# Altium PCB MCB1313epf.PcbDoc
Units mm, origin at the board's own origin, x right, y up, seen from the top; angles counter-clockwise.
Board outline 60 x 60 mm, 2 copper layers (Top Layer, Bottom Layer), stack 0.671 mm thick; 55 components, 64 nets, 243 pads, 30 vias.
Unrouted connection lines stored in the file: 3.
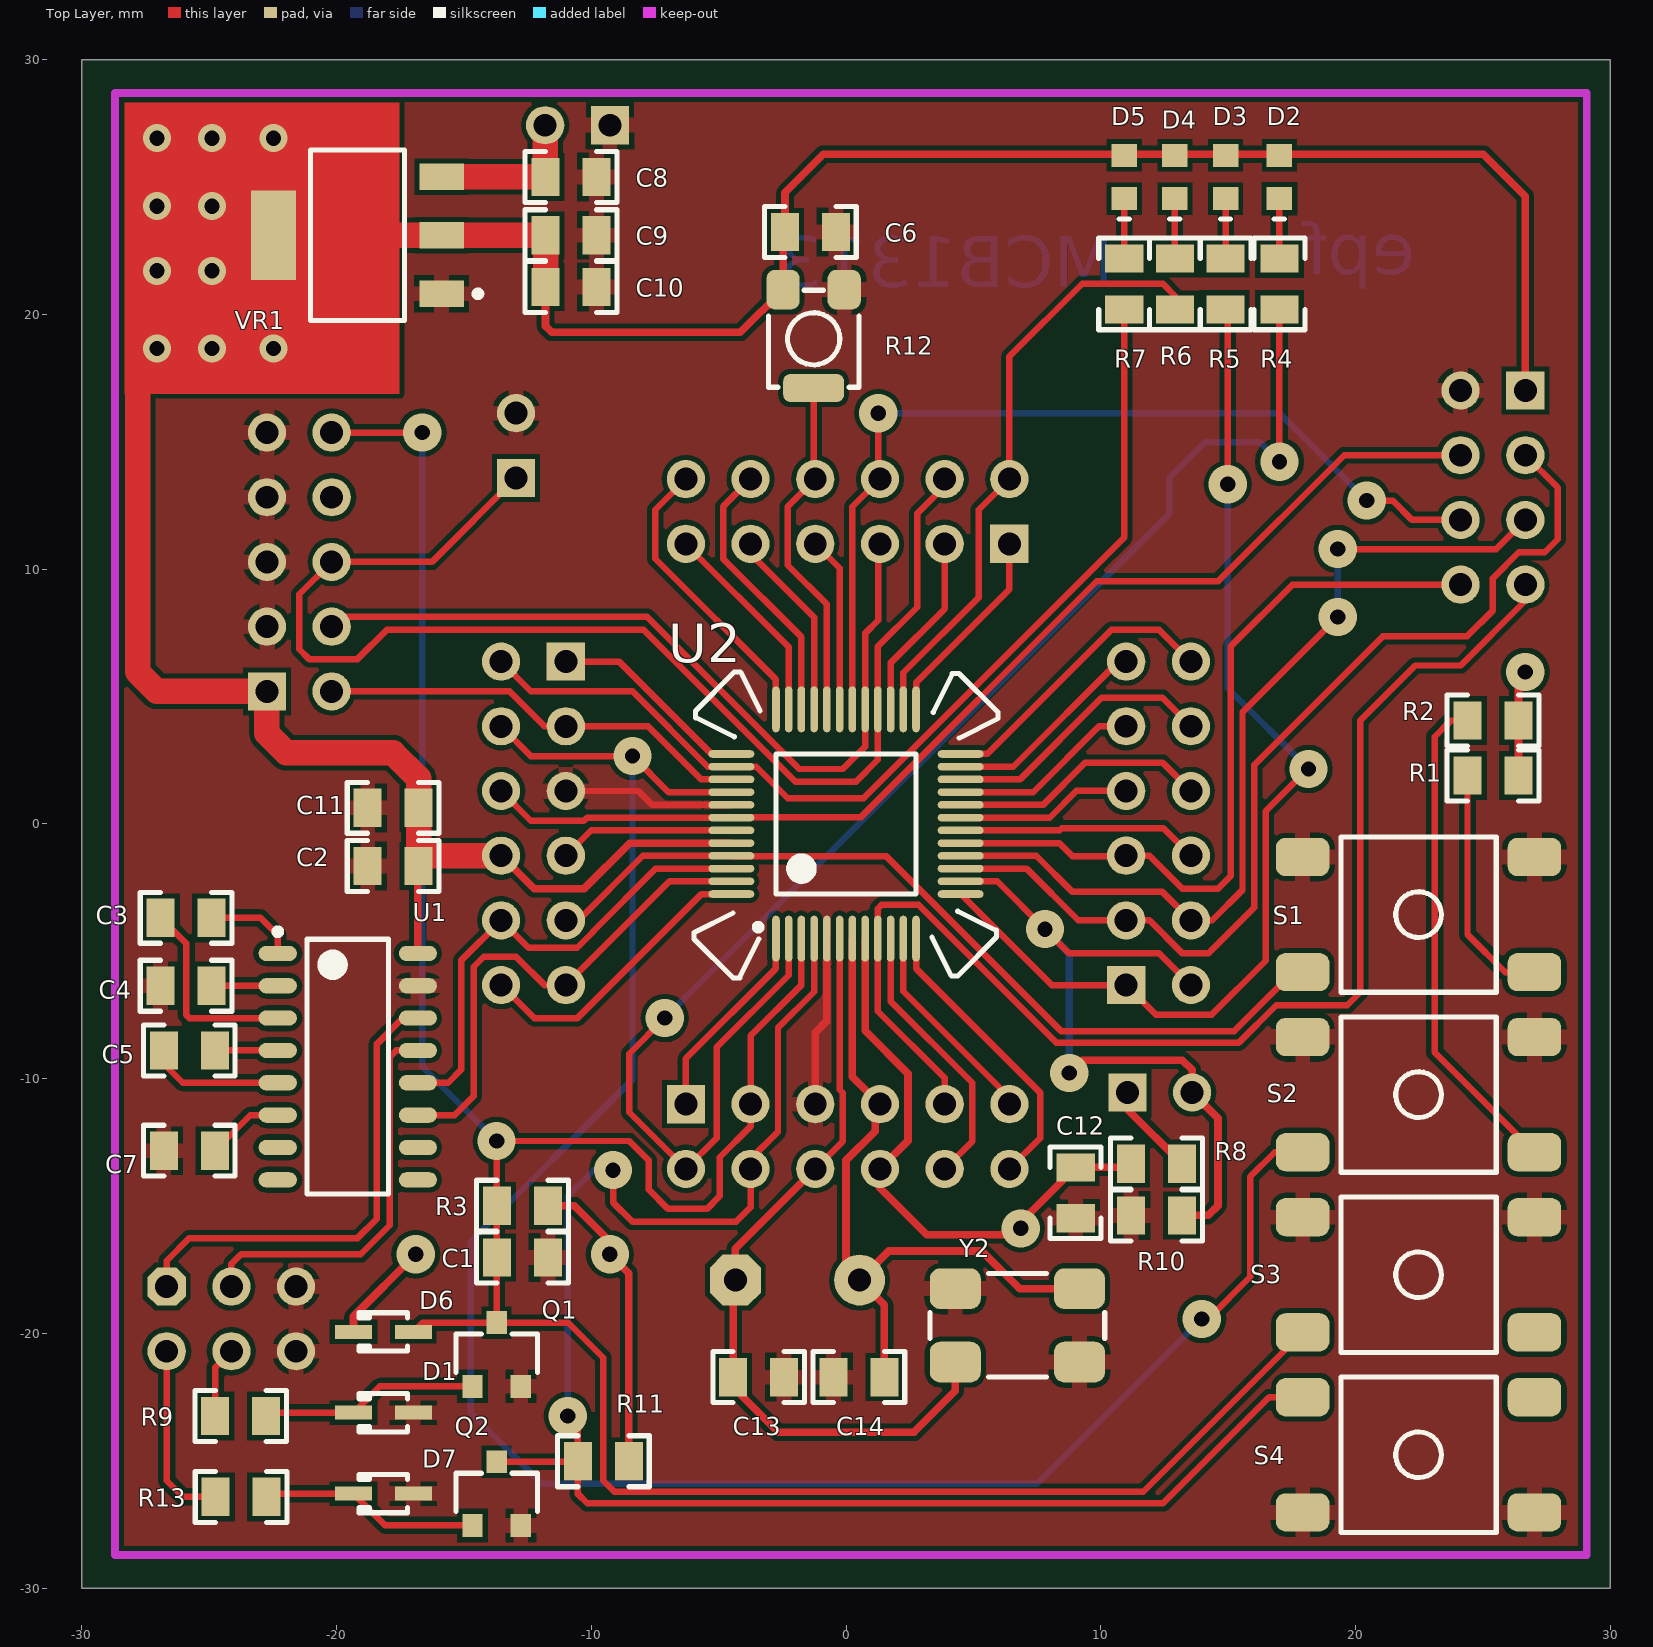
[diagram p0: Top Layer view]
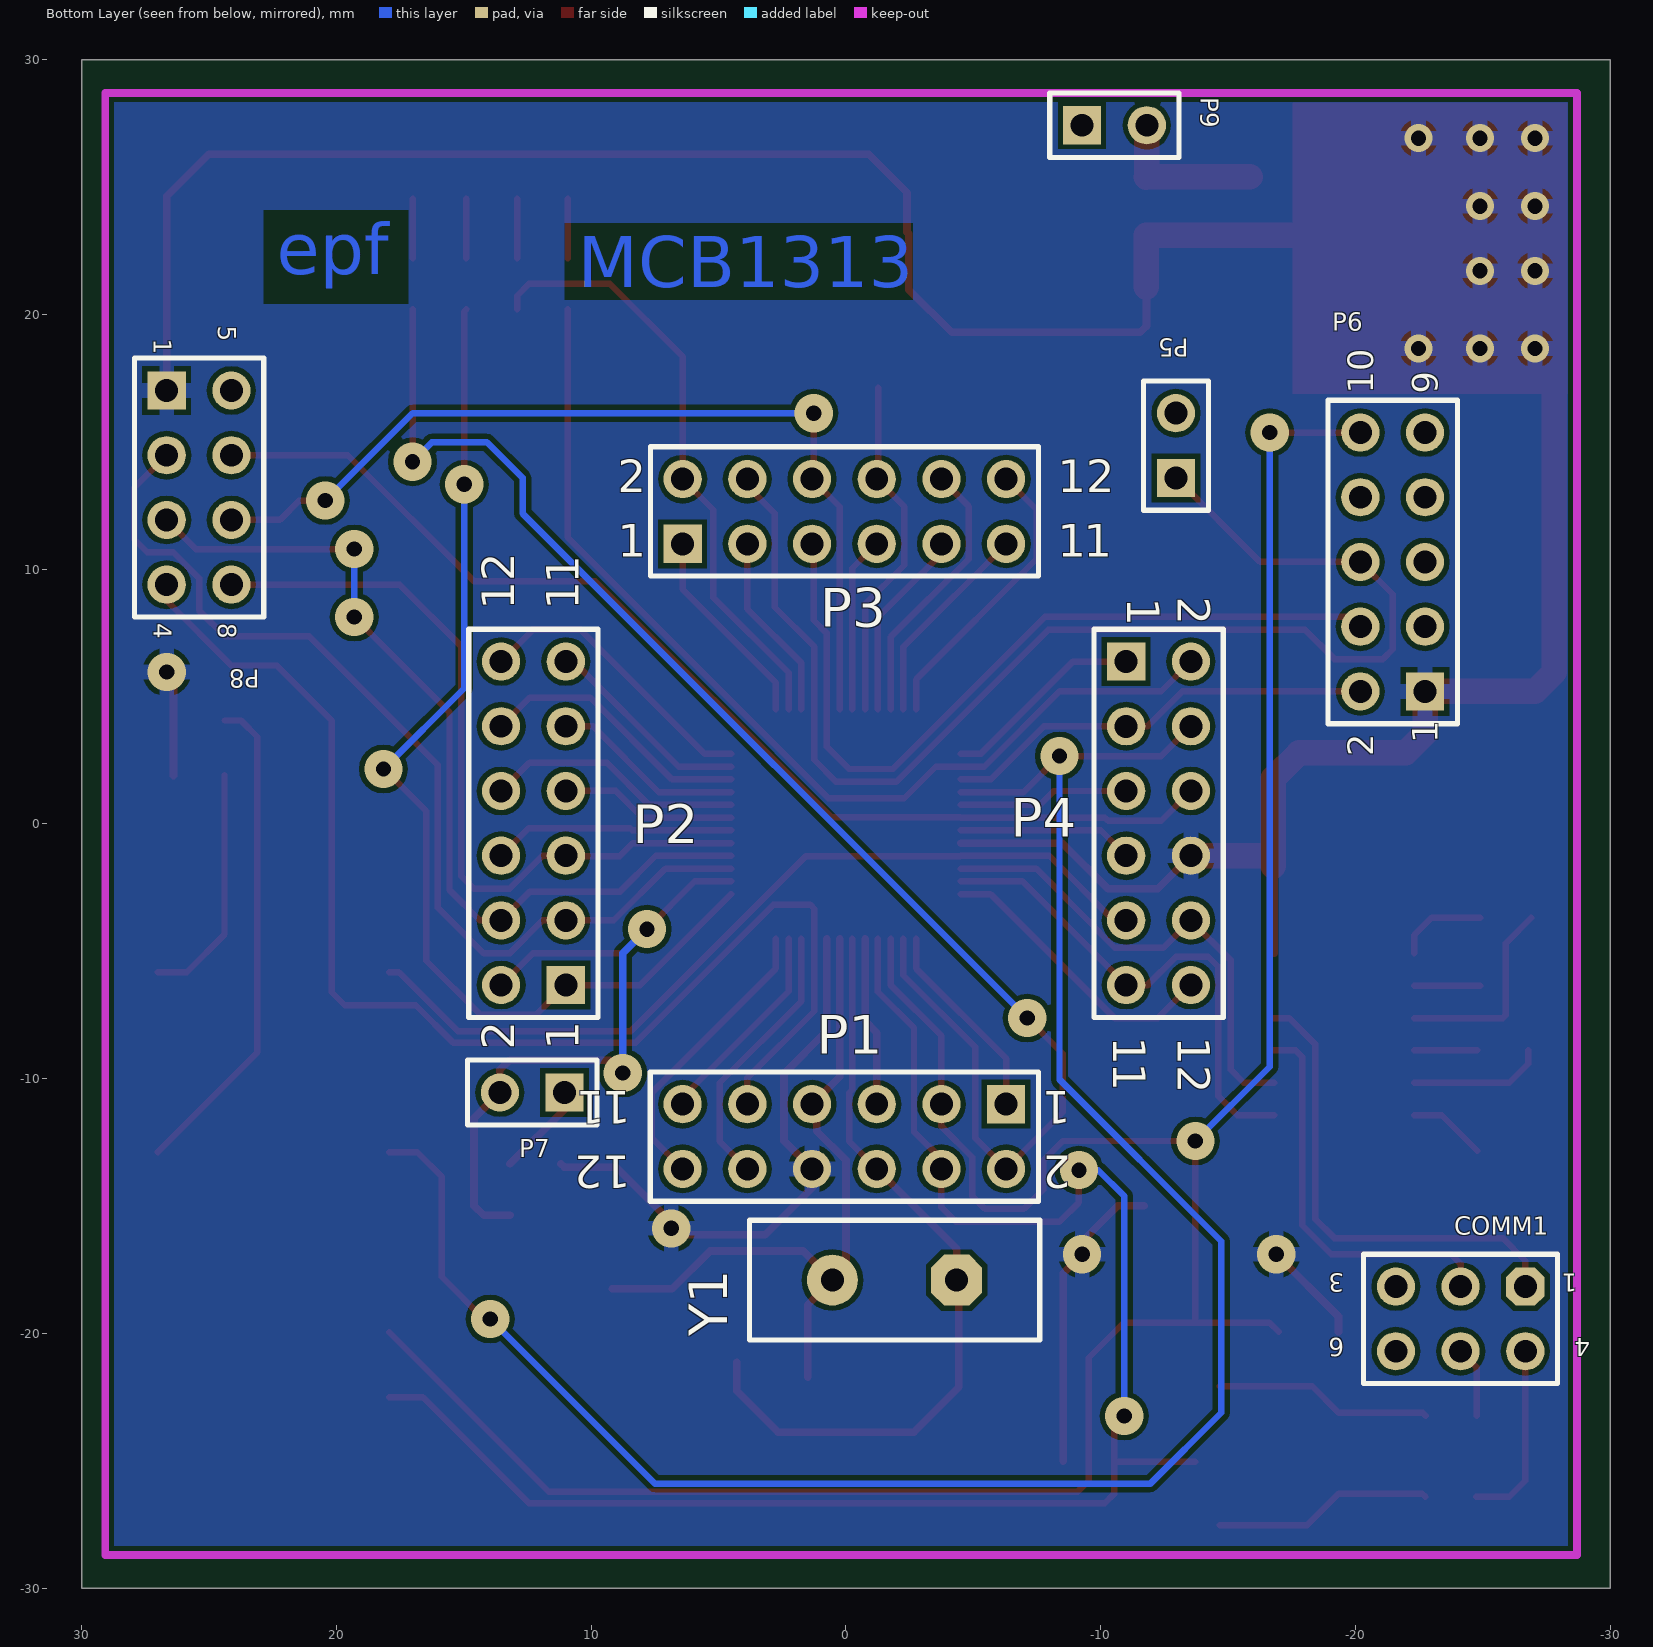
[diagram p1: Bottom Layer view, seen from below]

## Layer stack, top to bottom
Top Layer: signal copper 0.0356
Dielectric: core 0.6, FR-4, Dk 4.8
Bottom Layer: signal copper 0.0356

## Board outline
-30,-30 30,-30 30,30 -30,30

## Design rules (kind name [scope] priority, off if disabled: settings)
Clearance [All] p1: gap=0.2
PlaneConnect [All] p1: planeconnectstyle=Direct reliefexpansion=0.508 reliefentries=4 reliefconductorwidth=0.254 reliefairgap=0.254
PolygonConnect [All] p1: connectstyle=Relief reliefconductorwidth=0.6 reliefentries=4 polygonreliefangle="90 Angle"
RoutingVias [All] p1: holewidth=0.6 width=1.5 viastyle="Through Hole" minholewidth=0.6 minwidth=0.8 maxholewidth=3 maxwidth=3
SilkToSilkClearance [All] p1: silktosilkclearance=0
SilkscreenOverComponentPads [All] p1: minsilkscreentomaskgap=0
SolderMaskExpansion [All] p1: expansion=0.102
Width [All] p1: maxlimit=3 minlimit=0.2 preferedwidth=0.5
25 further rules are at their usual default settings.

## Components (designator, comment, footprint, x,y, rotation, side; value= is the part's Value field where it differs from the comment)
C1 "Capacitor" 0805_CAP -12.7,-17.018 r0 top
C2 "Capacitor" 0805_CAP -17.78,-1.651 r0 top
C3 "Capacitor" 0805_CAP -25.908,-3.683 r180 top
C4 "Capacitor" 0805_CAP -25.908,-6.35 r0 top
C5 "Capacitor" 0805_CAP -25.781,-8.89 r0 top
C6 "Capacitor" 0805_CAP -1.397,23.241 r180 top
C7 "Capacitor" 0805_CAP -25.781,-12.827 r0 top
C8 "Capacitor" 0805_CAP -10.795,25.4 r180 top
C9 "Capacitor" 0805_CAP -10.795,23.114 r180 top
C10 "Capacitor" 0805_CAP -10.795,21.082 r180 top
C11 "Capacitor" 0805_CAP -17.78,0.635 r0 top
C12 "Capacitor" 0805_CAP 9.017,-14.478 r90 top
C13 "Capacitor" 0805_CAP -3.429,-21.717 r180 top
C14 "Capacitor" 0805_CAP 0.508,-21.717 r180 top
COMM1 "AP_COMM" HDR2X3_CEN -26.67,-18.161 r0 bottom
D1 "BAS316" SOD-323 -18.161,-19.939 r180 top
D2 "LED" LED0603 17.018,25.4 r270 top
D3 "LED" LED0603 14.901,25.4 r270 top
D4 "LED" LED0603 12.912,25.4 r270 top
D5 "LED" LED0603 10.922,25.4 r270 top
D6 "BAS316" SOD-323 -18.161,-23.114 r180 top
D7 "BAS316" SOD-323 -18.161,-26.289 r180 top
P1 "Header 6X2" HDR2X6 -6.286,-11 r0 bottom locked
P2 "Header 6X2" HDR2X6 11,-6.324 r90 bottom locked
P3 "Header 6X2" HDR2X6 6.413,11 r180 bottom locked
P4 "Header 6X2" HDR2X6 -11,6.376 r270 bottom locked
P5 "Header 2" HDR1X2 -12.954,13.589 r90 bottom
P6 "Header 5X2" HDR2X5 -22.733,5.207 r90 bottom
P7 "Header 2" HDR1X2 11.049,-10.541 r0 bottom
P8 "DIG_OUT" HDR2X4_CEN 26.67,17.018 r270 bottom
P9 "Header 2" HDR1X2 -9.271,27.432 r180 bottom
Q1 "BC847B" SOT23 -13.716,-20.828 r0 top
Q2 "BC847B" SOT23 -13.716,-26.289 r0 top
R1 "Resistor" 0805_RES 25.4,1.905 r180 top
R2 "Resistor" 0805_RES 25.4,4.064 r180 top
R3 "Resistor" 0805_RES -12.7,-14.986 r0 top
R4 "Resistor" 0805_RES 17.018,21.203 r270 top
R5 "Resistor" 0805_RES 14.901,21.203 r270 top
R6 "Resistor" 0805_RES 12.912,21.203 r270 top
R7 "Resistor" 0805_RES 10.922,21.203 r270 top
R8 "Resistor" 0805_RES 12.192,-13.335 r0 top
R9 "Resistor" 0805_RES -23.765,-23.241 r180 top
R10 "Resistor" 0805_RES 12.192,-15.367 r180 top
R11 "Resistor" 0805_RES -9.525,-25.019 r0 top
R12 "Pot" POT_SMD -1.27,19.05 r180 top
R13 "Resistor" 0805_RES -23.749,-26.416 r180 top
S1 "SW-PB" "SW-PB6mm - 2" 22.479,-3.556 r180 top
S2 "SW-PB" "SW-PB6mm - 2" 22.479,-10.626 r180 top
S3 "SW-PB" "SW-PB6mm - 2" 22.479,-17.695 r0 top
S4 "SW-PB" "SW-PB6mm - 2" 22.479,-24.765 r180 top
U1 "MAX3232ESE" SOIC127P602-16BN -19.558,-9.525 r0 top
U2 "LPC1313FBD48/01" TQFP48_LPC1343 0,0 r0 top locked
VR1 "AMS1117" "SOT-223 - M3" -19.177,23.114 r90 top
Y1 "ECS-49-20-1" HC-49U -1.905,-17.907 r0 bottom
Y2 "SX6035" SX6035 6.731,-19.685 r0 top

## Footprints (in the part's own frame and the unit in brackets; to place one, negate y for a bottom-side part, rotate by r counter-clockwise, add the part's x,y. Pads: shape width x height; smd on the part's side, far side on the other; paste and mask are expansions set on the pad)
0805_CAP [mm]
  rect 1.1x1.5 smd: 1(-1,0) 2(1,0)
  silkscreen extent -1.8,-1 1.8,1, body extent -1,-0.62 1,0.63, height 0.78
0805_RES [mm]
  rect 1.1x1.5 smd: 1(-1,0) 2(1,0)
  silkscreen extent -1.8,-1 1.8,1, body extent -1,-0.62 1,0.63, height 0.78
HC-49U [mm] "Quartz Crystal, Thru-Hole; 2 Leads; Body 11.35 x 4.65 x 13.46 mm (LxWxH max)"
  oct 2x2 hole 0.9: 1(-2.44,0)
  round 2 hole 0.9: 2(2.44,0)
  silkscreen extent -5.7,-2.35 5.7,2.35
HDR1X2 [mm] "Connector; Header; 2 Position"
  rect 1.5x1.5 hole 0.9: 1(0,0)
  round 1.5 hole 0.9: 2(2.54,0)
  silkscreen extent -1.27,-1.27 3.81,1.27
HDR2X3_CEN [mm] "Connector; Header; 3x2 Position"
  oct 1.5x1.5 hole 0.9: 1(0,0)
  round 1.5 hole 0.9: 2(2.54,0) 3(5.08,0) 4(0,2.54) 5(2.54,2.54) 6(5.08,2.54)
  silkscreen extent -1.27,-1.27 6.35,3.81, body extent -1.27,-1.27 6.33,3.81, height 8.55
HDR2X4_CEN [mm] "Connector; Header; 4x2 Position"
  rect 1.5x1.5 hole 0.9: 1(0,0)
  round 1.5 hole 0.9: 2(2.54,0) 3(5.08,0) 4(7.62,0) 5(0,2.54) 6(2.54,2.54) 7(5.08,2.54) 8(7.62,2.54)
  silkscreen extent -1.27,-1.27 8.89,3.81, body extent -1.27,-1.25 8.89,3.79, height 8.55
HDR2X5 [mm] "Connector; Header; 5x2 Position"
  rect 1.5x1.5 hole 0.9: 1(0,0)
  round 1.5 hole 0.9: 2(0,2.54) 3(2.54,0) 4(2.54,2.54) 5(5.08,0) 6(5.08,2.54) 7(7.62,0) 8(7.62,2.54) 9(10.16,0) 10(10.16,2.54)
  silkscreen extent -1.27,-1.27 11.43,3.81, body extent -1.27,-1.27 11.41,3.81, height 8.55
HDR2X6 [mm] "Connector; Header; 6x2 Position"
  rect 1.5x1.5 hole 0.9: 1(0,0)
  round 1.5 hole 0.9: 2(0,2.54) 3(2.54,0) 4(2.54,2.54) 5(5.08,0) 6(5.08,2.54) 7(7.62,0) 8(7.62,2.54) 9(10.16,0) 10(10.16,2.54) 11(12.7,0) 12(12.7,2.54)
  silkscreen extent -1.27,-1.27 13.97,3.81
LED0603 [mm]
  rect 0.9x1 smd: 1(-0.85,0) 2(0.85,0)
  silkscreen extent 1.65,-0.2 1.65,0.2, body extent -0.81,-0.4 0.81,0.4, height 0.6
POT_SMD [mm]
  rrect50% 1.3x1.55 smd: 1(-1.2,-1.93) 2(1.2,-1.93)
  rrect50% 2.39x1.09 smd: 3(0,1.93)
  silkscreen extent -1.78,-1.91 1.78,1.91, body extent -1.52,-1.55 1.52,1.68, height 2
SOD-323 [mm] "SOD-323/SC-76; 2 Leads; Body 1.7 x 1.3 mm, (LxW)"
  rect 1.45x0.55 smd: 1(1.175,0) 2(-1.175,0)
  silkscreen extent -0.95,-0.75 0.95,0.75, body extent -1.3,-0.67 1.3,0.68, height 1.1
SOIC127P602-16BN [mm] "SOIC, 16-Leads, Body 9.9x3.9mm, Pitch 1.27mm, IPC Medium Density"
  oval 1.5x0.6 smd: 1(-2.75,4.445) 2(-2.75,3.175) 3(-2.75,1.905) 4(-2.75,0.635) 5(-2.75,-0.635) 6(-2.75,-1.905) 7(-2.75,-3.175) 8(-2.75,-4.445) 9(2.75,-4.445) 10(2.75,-3.175) 11(2.75,-1.905) 12(2.75,-0.635) 13(2.75,0.635) 14(2.75,1.905) 15(2.75,3.175) 16(2.75,4.445)
  silkscreen extent -2.87,-5 1.6,5.42, body extent -3,-5.1 3,5.1, height 1.7
SOT23 [mm]
  rect 0.8x0.9 smd: 1(-0.95,-1.25) 2(0.95,-1.25) 3(0,1.25)
  silkscreen extent -1.6,-0.7 1.6,0.8, body extent -1.5,-1.25 1.5,1.25, height 1.05
"SOT-223 - M3" [mm] "SOT-223/SC-73; 4 Leads; Body 6.7 x 7.3 mm, inc. leads (LxW max)"
  rect 1.05x1.75 smd: 1(-2.3,-3.3) 2(0,-3.3) 3(2.3,-3.3)
  rect 3.5x1.75 smd: 2(0,3.3)
  silkscreen extent -3.35,-4.85 3.35,1.85, body extent -3.32,-3.67 3.38,3.53, height 1.85
"SW-PB6mm - 2" [mm]
  rrect50% 2.1x1.5 smd: 1(-4.55,2.26) 1(4.55,2.26) 2(-4.55,-2.26) 2(4.55,-2.26)
  silkscreen extent -3.05,-3.05 3.05,3.05, body extent -4.5,-3 4.5,3, height 5
SX6035 [mm]
  rrect50% 2x1.6 smd: 1(-2.44,-1.441) 2(2.441,-1.441) 3(2.441,1.441) 4(-2.44,1.441)
  silkscreen extent -3.43,-2.03 3.43,2.03, body extent -3,-1.75 3,1.75, height 1.05
TQFP48_LPC1343 [mm] "48-Pin Thin Quad Flat Pack 0.5 mm Pitch, IPC Medium Density"
  oval 0.3x1.8 smd: 1(-2.75,-4.5) 2(-2.25,-4.5) 3(-1.75,-4.5) 4(-1.25,-4.5) 5(-0.75,-4.5) 6(-0.25,-4.5) 7(0.25,-4.5) 8(0.75,-4.5) 9(1.25,-4.5) 10(1.75,-4.5) 11(2.25,-4.5) 12(2.75,-4.5) 25(2.75,4.5) 26(2.25,4.5) 27(1.75,4.5) 28(1.25,4.5) 29(0.75,4.5) 30(0.25,4.5) 31(-0.25,4.5) 32(-0.75,4.5) 33(-1.25,4.5) 34(-1.75,4.5) 35(-2.25,4.5) 36(-2.75,4.5)
  oval 1.8x0.3 smd: 13(4.5,-2.75) 14(4.5,-2.25) 15(4.5,-1.75) 16(4.5,-1.25) 17(4.5,-0.75) 18(4.5,-0.25) 19(4.5,0.25) 20(4.5,0.75) 21(4.5,1.25) 22(4.5,1.75) 23(4.5,2.25) 24(4.5,2.75) 37(-4.5,2.75) 38(-4.5,2.25) 39(-4.5,1.75) 40(-4.5,1.25) 41(-4.5,0.75) 42(-4.5,0.25) 43(-4.5,-0.25) 44(-4.5,-0.75) 45(-4.5,-1.25) 46(-4.5,-1.75) 47(-4.5,-2.25) 48(-4.5,-2.75)
  silkscreen extent -5.96,-6.04 5.96,5.96, body extent -4.5,-4.5 4.5,4.5, height 1.64

## Part data
C1 C2 C3 C4 C5 C6 C7 C8 C9 C10 C11 C12 C13 C14: library part Cap
COMM1: "Header, 3-Pin, Dual row"
D2 D3 D4 D5: library part LED1
P1 P2 P3 P4: "Header, 6-Pin, Dual row"
P5 P7 P9: "Header, 2-Pin"
P6: "Header, 5-Pin, Dual row"
P8: library part AP_SALIDA_DIGITAL, "Header, 4-Pin, Dual row"
Q1 Q2: "NPN 100MHz"
R1 R2 R3 R4 R5 R6 R7 R8 R9 R10 R11 R13: library part Res
S1 S2 S3 S4: "Switch"
U1: library part MAX3232ESE+
U2: "ARM CortexM3 32K Flash, 8k RAM"
VR1: "Voltage Regulator"
Y1: "Crystal Oscillator"
Y2: library part XTAL_SX6035

## Via types
v1: diameter 1.5, hole 0.6, Top Layer to Bottom Layer, 20 vias
v2: diameter 1.1, hole 0.6, Top Layer to Bottom Layer, 10 vias

## Nets (pads, with @x,y where several pads share a name; then routed paths per layer and width w, separated by ;. In a path a pad name is that pad's centre, name@x,y a point inside that pad or via, vN(x,y) a via of type N, cw(c..) or ccw(c..) an arc to the next point about the centre after c; other vN are vias at no path point)
3V3: C2.2 C6.2 C9.2 C10.2 C11.2 C12.2 D1.1 D2.1 D3.1 D4.1 D5.1 P1.8 P4.8 P6.1 P8.1 R1.1 R2.1 R3.2 R8.1 R11.2 R12.2 U1.16 U2.8 U2.44 VR1.2 | length 155.2
  Top Layer w0.3: D1.1 -19.336,-19.336 v1(-16.891,-16.891) ; U1.16 -16.808,-1.679 C2.2 ; P4.8 -12.244,-2.54 -10.287,-2.54 -8.497,-0.75 U2.44 ; C10.2 -11.795,19.542 -11.557,19.304 -4.146,19.304 R12.2 -2.47,23.168 C6.2 -2.397,24.781 -0.889,26.289 25.019,26.289 26.67,24.638 P8.1 ; R3.2 -10.668,-14.986 -9.271,-16.383 v1(-9.271,-16.891) -8.525,-17.637 R11.2 ; U2.8 0.75,-8.116 2.434,-9.8 2.434,-12.44 P1.8 1.334,-14.288 3.175,-16.129 6.604,-16.129 v1(6.858,-15.875) 6.858,-15.637 C12.2 11.049,-13.478 R8.1 ; R1.1 R2.1 26.4,5.699 v1(26.67,5.969)
  Top Layer w1: -27.813,17.78 -27.813,5.969 -27.051,5.207 P6.1 -22.733,3.556 -21.971,2.794 -17.78,2.794 -16.78,1.794 C11.2 C2.2@-16.78,-1.244 ; VR1.2@-22.477,23.114 -15.877,23.114 C9.2 C10.2 ; C2.2 C2.2@-16.78,-1.244 ; P4.8 C2.2@-16.78,-1.244
  other v2: -27.051,18.669 -24.892,18.669 -22.479,18.669 -27.051,21.717 -24.892,21.717 -27.051,24.257 -24.892,24.257 -27.051,26.924 -24.892,26.924 -22.479,26.924
\RESET: C1.1 D1.2 P1.3 P6.10 Q1.3 R3.1 S3.2@17.929,-19.955 U2.3 | length 105.1
  Top Layer w0.254: P6.10 v1(-16.637,15.367) ; D1.2 -16.625,-19.578 Q1.3 ; U2.3 -1.75,-6.322 -3.746,-8.318 P1.3 -3.746,-11.874 -4.953,-13.081 -4.953,-14.605 -5.461,-15.113 -6.985,-15.113 -7.747,-14.351 -7.747,-13.208 -8.509,-12.446 v1(-13.716,-12.446) Q1.3 ; S3.2@17.929,-19.955 11.668,-26.216 -9.09,-26.216 -9.21,-26.096 -9.525,-25.781 -9.525,-20.955 -10.902,-19.578 Q1.3
  Bottom Layer w0.254: v1(-16.637,15.367) -16.637,-9.525 v1(-13.716,-12.446)
GND: C1.2 C2.1 C4.1 C6.1 C7.1 C8.1 C9.1 C10.1 C11.1 C12.1 C13.1 C14.2 COMM1.3 COMM1.6 D6.2 D7.2 P1.5 P4.5 P5.2 P6.3 P6.5 P6.7 P6.9 P8.5 P9.1 Q1.2 Q2.2 R10.2 R12.1 S1.2 S2.2 S3.1 S4.1 U1.15 U2.5 U2.41 VR1.1 Y2.2 Y2.4 | length 13.4
  Top Layer w0.254: P4.5 -8.154,1.296 -7.608,0.75 U2.41
  Top Layer w0.3: P1.5 -1.206,-8.191 -0.75,-7.735 U2.5
ISP13: P1.4 Q2.3 R11.1 S4.2@17.929,-22.505 U2.4 | length 66.4
  Top Layer w0.254: Q2.3 -10.545,-25.039 R11.1 ; v1(-10.922,-23.241) -10.525,-23.638 R11.1 ; v1(-9.144,-13.589) -9.144,-14.859 -8.382,-15.621 -4.318,-15.621 -3.746,-15.049 P1.4 -3.746,-13.154 -2.669,-12.077 -2.669,-8.003 -1.25,-6.584 U2.4 ; S4.2@17.929,-22.505 16.611,-22.505 12.446,-26.67 -10.16,-26.67 -10.525,-26.305 R11.1
  Bottom Layer w0.254: v1(-10.922,-23.241) -10.922,-14.605 -9.906,-13.589 v1(-9.144,-13.589)
LPC13_RXD: P4.10 U1.12 U2.46 | length 19.2
  Top Layer w0.254: U1.12 -15.621,-10.16 -15.113,-9.652 -15.113,-5.357 P4.10 -12.463,-4.861 -10.554,-4.861 -9.923,-4.23 -9.923,-4.208 -7.465,-1.75 U2.46
LPC13_TXD: P4.11 U1.11 U2.47 | length 20
  Top Layer w0.254: U1.11 -15.367,-11.43 -14.617,-10.68 -14.617,-5.6 -14.224,-5.207 -12.954,-5.207 -11.837,-6.324 P4.11 -6.926,-2.25 U2.47
NetC3_1: C3.1 U1.1 | length 3.6
  Top Layer w0.254: C3.1 -22.987,-3.683 -22.308,-4.362 U1.1
NetC3_2: C3.2 U1.3 | length 7.9
  Top Layer w0.254: C3.2 -25.908,-4.683 -25.908,-7.493 -25.781,-7.62 U1.3
NetC4_2: C4.2 U1.2 | length 2.6
  Top Layer w0.254: C4.2 U1.2
NetC5_1: C5.1 U1.5 | length 5.3
  Top Layer w0.254: C5.1 -26.781,-9.414 -26.035,-10.16 U1.5
NetC5_2: C5.2 U1.4 | length 2.5
  Top Layer w0.254: C5.2 U1.4
NetC7_2: C7.2 U1.6 | length 3.1
  Top Layer w0.254: C7.2 -23.384,-11.43 U1.6
NetD2_2: D2.2 R4.1 | length 2.3
  Top Layer w0.254: R4.1 D2.2
NetD3_2: D3.2 R5.1 | length 2.3
  Top Layer w0.254: R5.1 D3.2
NetD4_2: D4.2 R6.1 | length 2.3
  Top Layer w0.254: R6.1 D4.2
NetD5_2: D5.2 R7.1 | length 2.3
  Top Layer w0.254: R7.1 D5.2
NetD6_1: D6.1 Q1.1 R9.1 | length 8.6
  Top Layer w0.254: R9.1 -22.638,-23.114 D6.1 -18.3,-22.078 Q1.1
NetD7_1: D7.1 Q2.1 R13.1 | length 8.7
  Top Layer w0.254: R13.1 -22.622,-26.289 D7.1 -18.086,-27.539 Q2.1
NetP7_1: P7.1 R8.2 | length 3.7
  Top Layer w0.3: P7.1 11.049,-11.192 R8.2
PIO0_2: P1.10 U2.10 | length 10.8
  Top Layer w0.254: U2.10 1.75,-6.957 4.953,-10.16 4.953,-12.461 P1.10
PIO0_3: P2.2 P7.2 R10.1 U2.14 | length 29.3
  Top Layer w0.254: U2.14 5.933,-2.25 v1(7.81,-4.127) 8.763,-5.08 12.296,-5.08 P2.2
  Top Layer w0.3: v1(8.763,-9.779) 9.271,-9.271 13.208,-9.271 13.589,-9.652 P7.2 14.605,-11.557 14.605,-14.986 14.224,-15.367 R10.1
  Bottom Layer w0.3: v1(7.81,-4.127) 8.763,-5.08 v1(8.763,-9.779)
PIO0_4: P2.3 P8.2 U2.15 | length 39.4
  Top Layer w0.254: U2.15 7.084,-1.75 9.118,-3.784 P2.3 11.912,-3.784 13.208,-5.08 14.224,-5.08 16.021,-3.283 16.021,2.305 21.082,7.366 24.384,7.366 25.4,8.382 25.4,9.651 26.417,10.668 27.432,10.668 27.94,11.176 27.94,13.208 P8.2
PIO0_5: P2.4 P8.3 U2.16 | length 35.4
  Top Layer w0.254: U2.16 7.473,-1.25 8.89,-2.667 12.423,-2.667 P2.4 14.377,-3.784 15.567,-2.594 15.567,4.391 v1(19.304,8.128) ; v1(19.304,10.795) 25.527,10.795 P8.3
  Bottom Layer w0.254: v1(19.304,8.128) v1(19.304,10.795)
PIO0_6: P2.10 U2.22 | length 10.8
  Top Layer w0.254: U2.22 6.83,1.75 10.033,4.953 12.423,4.953 P2.10
PIO0_7: P2.11 U2.23 | length 8.2
  Top Layer w0.254: U2.23 6.568,2.25 10.694,6.376 P2.11
PIO0_8: P3.3 U2.27 | length 7.4
  Top Layer w0.254: U2.27 1.75,6.322 3.873,8.445 P3.3
PIO0_9: P3.4 P5.1 P6.6 U2.28 | length 50.8
  Top Layer w0.254: P5.1 -16.256,10.287 P6.6 -21.463,9.017 -21.463,6.858 -21.082,6.477 -19.177,6.477 -18.034,7.62 -7.937,7.62 -1.968,1.651 0.381,1.651 1.25,2.52 U2.28 1.25,6.965 2.794,8.509 2.794,12.192 3.873,13.271 P3.4
PIO0_10: P3.5 P6.4 U2.29 | length 32.1
  Top Layer w0.254: P6.4 -19.812,8.128 -7.803,8.128 -1.834,2.159 -0.127,2.159 0.75,3.036 U2.29 0.75,7.481 1.27,8.001 1.27,10.937 P3.5
PIO0_11: P3.8 R12.3 U2.32 | length 13.7
  Top Layer w0.254: R12.3 -1.27,13.603 P3.8 -2.286,12.461 -2.286,10.16 -0.75,8.624 U2.32
PIO1_0: P3.9 U2.33 | length 7.5
  Top Layer w0.254: P3.9 -3.747,10.605 -1.25,8.108 U2.33
PIO1_1: P3.10 U2.34 | length 10.8
  Top Layer w0.254: P3.10 -4.826,12.461 -4.826,10.414 -1.75,7.338 U2.34
PIO1_2: P3.11 U2.35 | length 8.2
  Top Layer w0.254: P3.11 -6.287,10.986 -2.25,6.949 U2.35
PIO1_3: P4.3 P6.2 U2.39 | length 17.1
  Top Layer w0.254: P6.2 -13.208,5.207 -11.837,3.836 P4.3 -7.773,3.836 -5.687,1.75 U2.39
PIO1_4: P4.4 R2.2 S2.1 U2.40 | length 99.5
  Top Layer w0.254: P4.4 -12.371,2.667 v1(-8.382,2.667) -6.965,1.25 U2.40 ; v1(13.97,-19.431) 14.224,-19.431 15.875,-17.78 15.875,-13.843 16.832,-12.886 S2.1@17.929,-12.886 ; R2.2 23.749,4.064 23.114,3.429 23.114,-8.971 S2.1@27.029,-12.886
  Bottom Layer w0.254: v1(-8.382,2.667) -8.382,-10.033 -14.732,-16.383 -14.732,-23.114 -11.938,-25.908 7.493,-25.908 v1(13.97,-19.431)
PIO1_5: P4.9 R1.2 S1.1 U2.45 | length 43.3
  Top Layer w0.254: P4.9 -10.515,-3.784 -7.981,-1.25 U2.45 -4.477,-1.273 1.59,-1.273 8.445,-8.128 15.24,-8.128 17.552,-5.816 S1.1@17.929,-5.816 ; R1.2 24.4,-4.334 25.882,-5.816 S1.1@27.029,-5.816
PIO1_8: P1.9 P8.4 U2.9 | length 50.6
  Top Layer w0.254: P1.9 3.874,-9.97 1.25,-7.346 U2.9 1.25,-3.322 1.397,-3.175 2.85,-3.175 3.227,-3.552 5.87,-6.195 8.257,-8.582 15.428,-8.582 16.895,-7.116 19.681,-7.116 20.193,-6.604 20.193,4.064 22.352,6.223 24.13,6.223 26.67,8.763 P8.4
PIO1_9: P2.5 P8.8 U2.17 | length 30.6
  Top Layer w0.254: U2.17 8.37,-0.75 8.89,-1.27 10.974,-1.27 P2.5 11.912,-1.244 13.208,-2.54 14.605,-2.54 15.113,-2.032 15.113,6.985 17.526,9.398 P8.8
PIO1_10: P3.6 P8.7 U2.30 | length 36.7
  Top Layer w0.254: U2.30 0.25,12.457 P3.6 1.27,13.603 v1(1.27,16.129) ; v1(20.447,12.7) 21.463,12.7 22.225,11.938 P8.7
  Bottom Layer w0.254: v1(1.27,16.129) 17.018,16.129 v1(20.447,12.7)
PIO1_11: P4.6 P8.6 U2.42 | length 44.1
  Top Layer w0.254: P4.6 -12.371,0.127 -10.287,0.127 -10.164,0.25 U2.42 -4.477,0.273 0.59,0.273 9.842,9.525 14.605,9.525 19.558,14.478 P8.6
PIO2_0: P1.2 R4.2 U2.2 | length 58.7
  Top Layer w0.254: v1(-7.112,-7.62) -8.509,-9.017 -8.509,-11.317 P1.2 -5.08,-12.334 -5.08,-8.763 -2.25,-5.933 U2.2 ; v1(17.018,14.224) R4.2
  Bottom Layer w0.254: v1(-7.112,-7.62) 12.7,12.192 12.7,13.589 14.097,14.986 16.256,14.986 v1(17.018,14.224)
PIO2_1: P2.1 R5.2 U2.13 | length 42.5
  Top Layer w0.254: U2.13 8.074,-6.324 P2.1 12.169,-7.493 14.351,-7.493 16.475,-5.369 16.475,0.508 18.126,2.159 v1(18.161,2.159) ; R5.2 14.986,20.119 v1(14.986,13.335)
  Bottom Layer w0.254: v1(14.986,13.335) 14.986,5.334 v1(18.161,2.159)
PIO2_2: P3.2 R6.2 U2.26 | length 24
  Top Layer w0.254: U2.26 2.25,5.933 5.207,8.89 5.207,12.334 P3.2 6.413,18.351 9.271,21.209 12.446,21.209 12.912,20.743 R6.2
PIO2_3: P4.2 R7.2 U2.38 | length 39.9
  Top Layer w0.254: P4.2 -12.371,5.207 -8.382,5.207 -5.425,2.25 U2.38 -3.52,2.25 -2.286,1.016 0.691,1.016 10.922,11.247 R7.2
PIO2_4: P2.7 U2.19 | length 6.9
  Top Layer w0.254: U2.19 7.997,0.25 9.043,1.296 P2.7
PIO2_5: P2.8 U2.20 | length 10.2
  Top Layer w0.254: U2.20 7.735,0.75 9.398,2.413 12.423,2.413 P2.8
PIO2_6: P1.1 U2.1 | length 8
  Top Layer w0.254: P1.1 -6.286,-9.207 -2.75,-5.671 U2.1
PIO2_7: P1.11 U2.11 | length 8.2
  Top Layer w0.254: U2.11 2.25,-6.568 6.414,-10.732 P1.11
PIO2_8: P1.12 U2.12 | length 11.6
  Top Layer w0.254: U2.12 2.75,-5.671 7.62,-10.541 7.62,-12.334 P1.12
PIO2_9: P2.12 U2.24 | length 11.6
  Top Layer w0.254: U2.24 5.544,2.75 10.414,7.62 12.296,7.62 P2.12
PIO2_10: P3.1 U2.25 | length 8
  Top Layer w0.254: U2.25 2.75,5.544 6.413,9.207 P3.1
PIO2_11: P3.7 U2.31 | length 6.9
  Top Layer w0.254: P3.7 -0.25,10.043 U2.31
PIO3_0: P3.12 U2.36 | length 11.5
  Top Layer w0.254: P3.12 -7.493,12.334 -7.493,10.414 -2.75,5.671 U2.36
PIO3_1: P4.1 U2.37 | length 8
  Top Layer w0.254: P4.1 -8.909,6.376 -5.283,2.75 U2.37
PIO3_2: P4.7 U2.43 | length 6.9
  Top Layer w0.254: P4.7 -10.006,-0.25 U2.43
PIO3_3: P4.12 U2.48 | length 11.6
  Top Layer w0.254: P4.12 -12.244,-7.62 -10.541,-7.62 -5.671,-2.75 U2.48
PIO3_4: P2.6 U2.18 | length 9.5
  Top Layer w0.254: U2.18 8.386,-0.25 8.469,-0.167 12.463,-0.167 P2.6
PIO3_5: P2.9 U2.21 | length 7.6
  Top Layer w0.254: U2.21 7.346,1.25 9.932,3.836 P2.9
UDTR3: COMM1.5 R9.2 | length 2.8
  Top Layer w0.254: R9.2 -24.765,-21.336 COMM1.5
URTS3: COMM1.4 R13.2 | length 7.3
  Top Layer w0.254: COMM1.4 -26.67,-25.781 -26.035,-26.416 R13.2
URXD3: COMM1.1 U1.14 | length 18.8
  Top Layer w0.254: COMM1.1 -26.67,-17.145 -25.781,-16.256 -19.177,-16.256 -18.415,-15.494 -18.415,-8.636 -17.399,-7.62 U1.14
UTXD3: COMM1.2 U1.13 | length 15.6
  Top Layer w0.254: COMM1.2 -24.13,-17.272 -23.749,-16.891 -19.05,-16.891 -17.907,-15.748 -17.907,-9.144 -17.653,-8.89 U1.13
VIN: C8.2 P9.2 VR1.3 | length 6.1
  Top Layer w1: VR1.3 -11.813,25.414 C8.2@-11.811,25.416 ; P9.2 C8.2@-11.811,25.416 ; C8.2 C8.2@-11.811,25.416
XTALIN: C13.2 P1.6 U2.6 Y1.1 Y2.1 | length 30.7
  Top Layer w0.254: P1.6 -0.129,-12.463 -0.129,-10.554 -0.25,-10.433 U2.6
  Top Layer w0.3: P1.6 -4.345,-16.679 Y1.1 -4.429,-17.991 C13.2 -4.429,-22.114 -2.667,-23.876 2.667,-23.876 4.291,-22.252 Y2.1
XTALOUT: C14.1 P1.7 U2.7 Y1.2 Y2.3 | length 28.6
  Top Layer w0.3: U2.7 0.25,-9.916 P1.7 1.143,-11.191 1.143,-12.065 0,-13.208 0,-17.372 Y1.2 ; C14.1 1.508,-18.88 Y1.2 ; Y2.3 6.814,-18.244 5.334,-16.764 1.678,-16.764 Y1.2
pads on no net: P6.8 S3.2@27.029,-19.955 S4.2@27.029,-22.505 U1.7 U1.8 U1.9 U1.10

## Polygon pours and split planes (outlines as drawn)
3V3 on Bottom Layer "VCC_Bottom" (solid, remove dead copper, pour order 4): -28.7,-28.7 29.083,-28.7 29.083,28.7 -28.7,28.7 -28.7,-28.7
GND on Top Layer "GND_TOP" (solid, remove dead copper, pour order 5): -28.7,-28.7 29.083,-28.7 29.083,28.7 -28.7,28.7 -28.7,-28.7

## Keep-outs
Keep-Out Layer:
  lines w0.3: -28.7,-28.7 29.083,-28.7 29.083,28.7 -28.7,28.7 -28.7,-28.7

## Other copper
Top Layer:
  rectangle net 3V3: -28.321,16.891 -17.526,28.321
Bottom Layer:
  text "epf" at 22.352,21.59 h2
  text "MCB1313" at 10.541,21.082 h2

## Silkscreen, mask and mechanical layers (free items; w line width, h text height)
Borde:
  lines w0.2: -29.972,-29.972 29.972,-29.972 29.972,29.972 -29.972,29.972 -29.972,-29.972

## Dimensions
-28.7,-28.7 to 29.083,-28.7 on Mechanical 1
-28.7,-28.7 to -28.7,28.7 on Mechanical 1

## Text inside footprints (layer, text, board x,y; h text height)
COMM1: Bottom Overlay "6" at -19.558,-20.193 h0.7 r180; Bottom Overlay "3" at -19.558,-17.653 h0.7 r180; Bottom Overlay "1" at -28.702,-17.653 h0.7 r180; Bottom Overlay "4" at -29.21,-20.193 h0.7 r180
P1: Bottom Overlay "2" at -8.826,-13.032 h1.27 r180; Bottom Overlay "1" at -8.826,-10.492 h1.27 r180; Bottom Overlay "1" at 8.446,-10.492 h1.27 r180; Bottom Overlay "1" at 9.462,-10.492 h1.27 r180; Bottom Overlay "12" at 8.446,-13.032 h1.27 r180
P2: Bottom Overlay "2" at 13.032,-8.864 h1.27 r270; Bottom Overlay "1" at 10.492,-8.864 h1.27 r270; Bottom Overlay "1" at 10.492,9.424 h1.27 r270; Bottom Overlay "1" at 10.492,8.408 h1.27 r270; Bottom Overlay "12" at 13.032,8.408 h1.27 r270
P3: Bottom Overlay "2" at 8.953,13.032 h1.27; Bottom Overlay "1" at 8.953,10.492 h1.27; Bottom Overlay "1" at -8.319,10.492 h1.27; Bottom Overlay "1" at -9.335,10.492 h1.27; Bottom Overlay "12" at -8.319,13.032 h1.27
P4: Bottom Overlay "2" at -13.032,8.916 h1.27 r90; Bottom Overlay "1" at -11.033,8.89 h1.27 r90; Bottom Overlay "1" at -10.492,-8.356 h1.27 r90; Bottom Overlay "1" at -10.492,-9.372 h1.27 r90; Bottom Overlay "12" at -13.032,-8.356 h1.27 r90
P6: Bottom Overlay "2" at -20.701,2.667 h1 r270; Bottom Overlay "1" at -23.241,3.175 h1 r270; Bottom Overlay "9" at -23.241,16.891 h1 r270; Bottom Overlay "10" at -20.701,16.891 h1 r270
P8: Bottom Overlay "5" at 24.638,19.558 h0.7 r90; Bottom Overlay "1" at 27.178,19.05 h0.7 r90; Bottom Overlay "4" at 27.178,7.874 h0.7 r90; Bottom Overlay "8" at 24.638,7.874 h0.7 r90